# Altium PCB 30A四路继电器控制板.PcbDoc
Units mm, origin at the board's own origin, x right, y up, seen from the top; angles counter-clockwise.
Board outline 254.38 x 101.09 mm, 2 copper layers (Top Layer, Bottom Layer); 44 components, 40 nets, 112 pads, 9 vias.
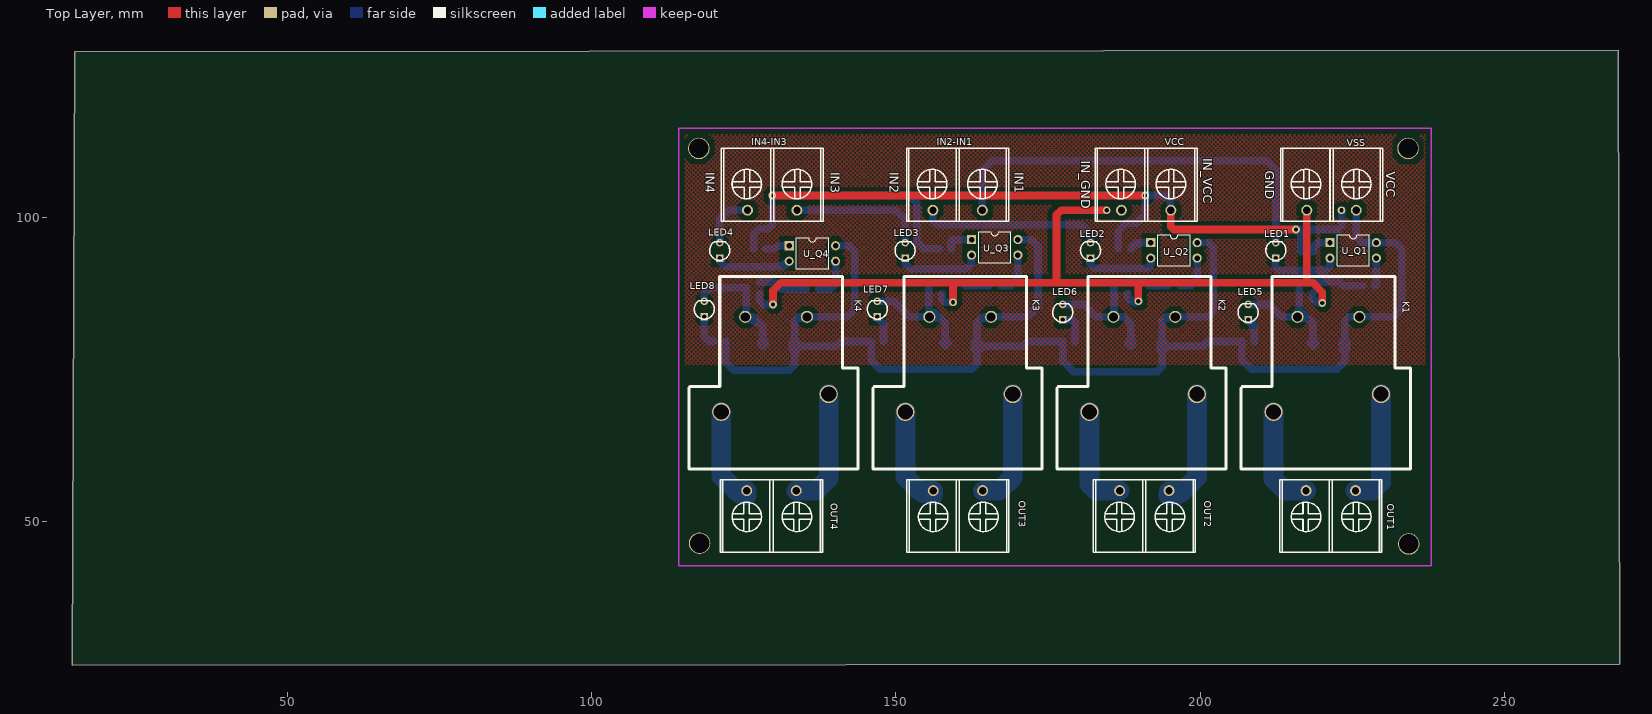
[diagram p0: Top Layer view]
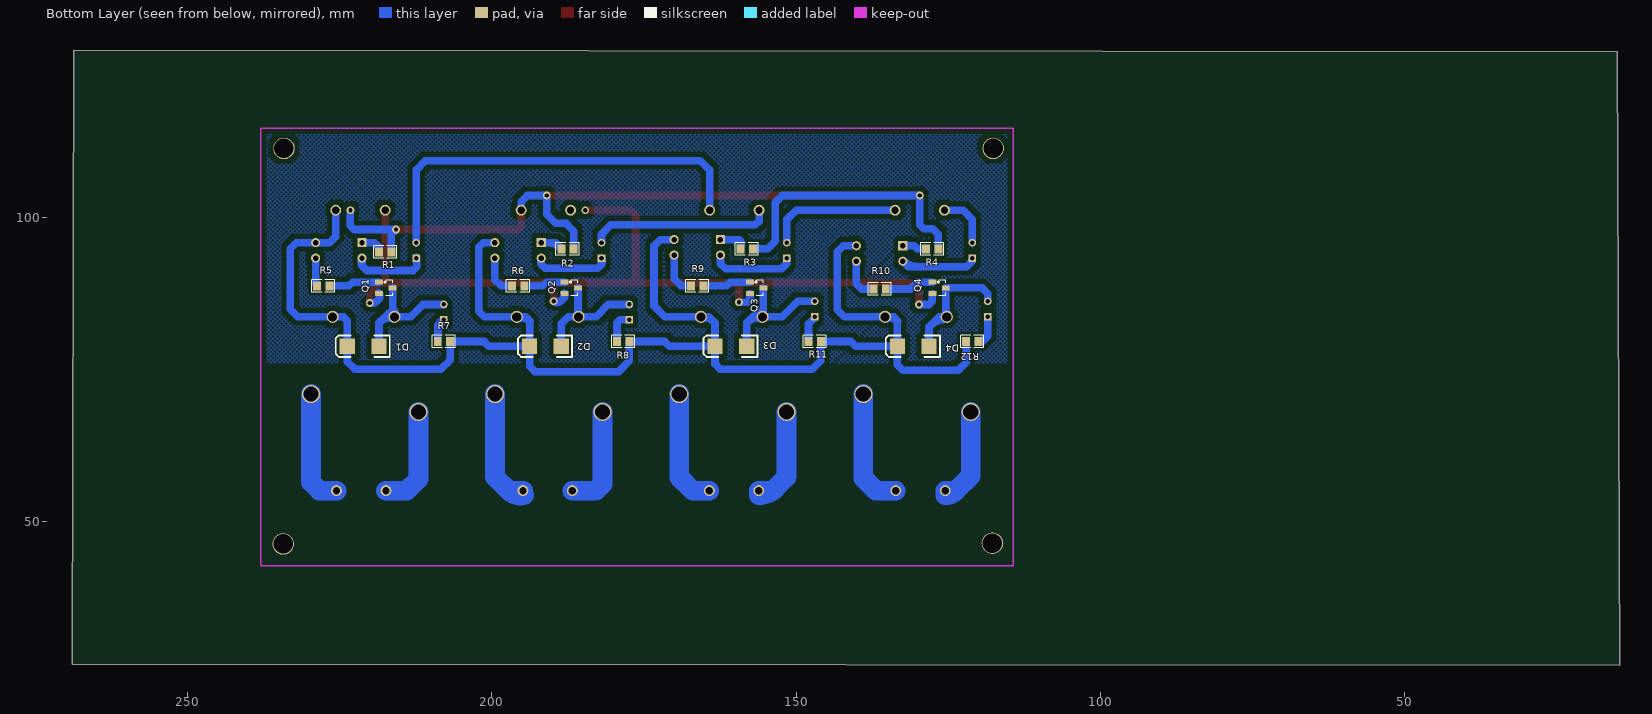
[diagram p1: Bottom Layer view, seen from below]

## Layer stack, top to bottom
Top Layer: signal copper 0.0356
Dielectric: dielectric 0.32, FR-4, Dk 4.8
Bottom Layer: signal copper 0.0356

## Board outline
14.605,26.416 268.986,26.543 268.732,127.508 14.986,127.254

## Design rules (kind name [scope] priority, off if disabled: settings)
Clearance [All] p1: gap=0.754
ComponentClearance [All] p1: gap=0.254 collisioncheckmode=3 verticalgap=0.254
PolygonConnect [All] p1: connectstyle=Relief reliefconductorwidth=0.254 reliefentries=4 polygonreliefangle="90 Angle"
RoutingVias [All] p1: holewidth=0.711 width=1.27 viastyle="Through Hole" minholewidth=0.711 minwidth=1.27 maxholewidth=0.711 maxwidth=1.27
SolderMaskExpansion [All] p1: expansion=0.102
TestPointUsage [All] p1: valid=0 allowmultiple=FALSE
Testpoint [All] p1: side=15 testpointundercomponent=TRUE minsize=1.016 maxsize=2.54 preferedsize=1.524 minholesize=0 maxholesize=1.016 preferedholesize=0.813 testpointgrid=0.025 style=1023 order=0-112345678
Width Width_1 [InNetClass('3mm')] p1: maxlimit=3.254 minlimit=3.254 preferedwidth=3.254
Width [All] p2: maxlimit=1.254 minlimit=1.254 preferedwidth=1.254
17 further rules are at their usual default settings.

## Classes and differential pairs
net class 3mm: NetK1_3 NetK1_4 NetK2_3 NetK2_4 NetK3_3 NetK3_4 NetK4_3 NetK4_4

## Components (designator, comment, footprint, x,y, rotation, side; value= is the part's Value field where it differs from the comment)
D1 "ZL2JG" 7227 223.647,78.867 r0 bottom
D2 "ZL2JG" 7227 193.675,78.867 r0 bottom
D3 "ZL2JG" 7227 163.195,78.867 r0 bottom
D4 "ZL2JG" 7227 133.223,78.867 r0 bottom
IN2-IN1 "PZ_2" KF8500-2 156.083,101.219 r90 top (schematic designator IN1-IN2)
IN4-IN3 "PZ_2" KF8500-2 125.603,101.219 r90 top (schematic designator IN3-IN4)
K1 "JDQ1K" SLA-12VDC-SL-A 229.869,72.515 r180 top
K2 "JDQ1K" SLA-12VDC-SL-A 199.603,72.515 r180 top
K3 "JDQ1K" SLA-12VDC-SL-A 169.338,72.515 r180 top
K4 "JDQ1K" SLA-12VDC-SL-A 139.072,72.515 r180 top
LED1 "" LED_D 210.947,95.123 r90 top
LED2 "" LED_D 180.467,95.123 r90 top
LED3 "" LED_D 149.987,95.123 r90 top
LED4 "" LED_D 119.507,95.123 r90 top
LED5 "" LED_D 206.375,84.963 r90 top
LED6 "" LED_D 175.895,84.963 r90 top
LED7 "" LED_D 145.415,85.471 r90 top
LED8 "" LED_D 116.967,85.471 r90 top
OUT1 "PZ_2" KF8500-2 225.559,55.116 r270 top
OUT2 "PZ_2" KF8500-2 194.91,55.116 r270 top
OUT3 "PZ_2" KF8500-2 164.26,55.116 r270 top
OUT4 "PZ_2" KF8500-2 133.611,55.116 r270 top
Q1 "NPN" SO-G3 217.551,87.503 r270 bottom
Q2 "NPN" SO-G3 187.071,87.503 r270 bottom
Q3 "NPN" SO-G3 156.591,87.503 r270 bottom
Q4 "NPN" SO-G3 126.619,87.503 r270 bottom
R1 "Res" TP-0805-R 215.011,93.091 r180 bottom
R2 "Res" TP-0805-R 185.039,93.599 r180 bottom
R3 "Res" TP-0805-R 155.575,93.599 r180 bottom
R4 "Res" TP-0805-R 125.095,93.599 r180 bottom
R5 "Res" TP-0805-R 230.251,90.043 r0 bottom
R6 "Res" TP-0805-R 198.247,90.043 r0 bottom
R7 "Res" TP-0805-R 205.359,78.359 r180 bottom
R8 "Res" TP-0805-R 175.895,78.359 r180 bottom
R9 "Res" TP-0805-R 168.783,90.043 r0 bottom
R10 "Res" TP-0805-R 138.811,89.535 r0 bottom
R11 "Res" TP-0805-R 144.399,78.359 r180 bottom
R12 "Res" TP-0805-R 123.571,80.899 r0 bottom
U_Q1 "GO" DIP-4 225.171,94.615 r270 top
U_Q2 "GO" DIP-4 195.707,94.615 r270 top
U_Q3 "GO" DIP-4 166.243,95.123 r270 top
U_Q4 "GO" DIP-4 136.271,94.107 r270 top
VCC "PZ_2" KF8500-2 187.071,101.219 r90 top
VSS "PZ_2" KF8500-2 217.551,101.219 r90 top

## Footprints (in the part's own frame and the unit in brackets; to place one, negate y for a bottom-side part, rotate by r counter-clockwise, add the part's x,y. Pads: shape width x height; smd on the part's side, far side on the other; paste and mask are expansions set on the pad)
7227 [mm]
  rect 2.5x2.54 smd: 1(0.127,0) 2(-5.08,0)
  silkscreen extent -6.86,-1.78 2.03,1.78
DIP-4 [mm] "直插4管脚"
  rect 1.5x1.5 hole 0.9: 1(-1.27,-3.81)
  round 1.5 hole 0.9: 2(1.27,-3.81) 3(1.27,3.81) 4(-1.27,3.81)
  silkscreen extent -2.55,-2.65 2.55,2.65
KF8500-2 [mm] "2P螺丝端子"
  round 1.8 hole 1.2: 1(0,0) 2(0,-8.128)
  silkscreen extent -1.78,-12.45 10.16,4.32
LED_D [mm] "发光二极管_3mm"
  rect 1.25x1.25 hole 0.75: 1(-1.778,-1.524)
  round 1.25 hole 0.75: 2(0.762,-1.524)
  silkscreen extent -2.16,-3.17 0.89,0.13
SLA-12VDC-SL-A [mm] "继电器"
  round 2 hole 1.5: 1(3.683,-11.176) 2(13.843,-11.176)
  round 3 hole 2.5: 3(17.78,4.445) 4(0.127,1.524)
  silkscreen extent -4.7,-17.78 23.11,13.84
SO-G3 [mm] "贴片三极管"
  rect 0.85x1.3 smd: 1(-1.9,-0.983) 2(0,-0.983) 3(-0.95,1.217)
  silkscreen extent -2.23,-0.13 0.32,1.22
TP-0805-R [mm] "贴片0805"
  rect 1.3x1.5 smd: 1(-3.556,1.27) 2(-1.524,1.27)
  silkscreen extent -4.44,0.25 -0.63,2.29

## Part data
D1 D2 D3 D4: "整流二极管"
IN2-IN1 IN4-IN3 VCC VSS: "排针——2"
K1 K2 K3 K4: library part JDQYCK, "继电器——1常开1常闭"
LED1 LED2 LED3 LED4 LED5 LED6 LED7 LED8: library part LED, "发光二极管"
OUT1 OUT2 OUT3 OUT4: library part PZ_3, "排针——3"
Q1 Q2 Q3 Q4: "NPN Bipolar Transistor"
R1 R3 R4 R5 R6 R7 R8 R9 R10 R11 R12: "电阻"
R2: library part Res2, "Resistor"
U_Q1 U_Q2 U_Q3 U_Q4: "光耦"

## Free pads (board coordinates)
  round 3.524 hole 3.2: 0(117.602,111.379) 1(117.729,46.482) 2(234.188,111.379) 3(234.315,46.355)

## Via types
v1: diameter 1.27, hole 0.711, Top Layer to Bottom Layer, 9 vias

## Nets (pads, with @x,y where several pads share a name; then routed paths per layer and width w, separated by ;. In a path a pad name is that pad's centre, name@x,y a point inside that pad or via, vN(x,y) a via of type N, cw(c..) or ccw(c..) an arc to the next point about the centre after c; other vN are vias at no path point)
GND: Q1.2 Q2.2 Q3.2 Q4.2 VSS.1 | length 150.2
  Top Layer w1.254: v1(129.794,85.725) 129.794,88.011 131.064,89.281 218.567,89.281 220.091,87.757 v1(220.091,85.979) ; v1(159.385,86.106) 159.385,89.281 ; 176.403,89.281 176.403,100.457 177.165,101.219 v1(184.658,101.219) ; v1(189.865,86.233) 189.865,89.281 ; 217.551,89.281 VSS.1
  Bottom Layer w1.254: Q4.2 127.602,86.266 128.143,85.725 v1(129.794,85.725) ; Q3.2 157.574,86.52 157.988,86.106 v1(159.385,86.106) ; Q2.2 188.054,86.901 188.722,86.233 v1(189.865,86.233) ; Q2.2@188.087,87.565 ccw(c188.949,87.287) 188.308,86.647 ; 188.625,86.33 ccw(c189.295,86.999) v1@189.86,86.239 ; Q1.2 218.534,86.647 219.202,85.979 v1(220.091,85.979) ; Q1.2@218.601,87.63 ccw(c219.25,87.108) 218.661,86.52 ; 218.978,86.203 ccw(c219.694,86.918) v1@220.088,85.986
IN1: IN2-IN1.2 LED1.2 | length 68.1
  Bottom Layer w1.254: IN2-IN1.2 164.211,107.823 165.735,109.347 210.947,109.347 212.471,107.823 LED1.2
IN2: IN2-IN1.1 LED2.2 | length 30
  Bottom Layer w1.254: IN2-IN1.1 156.083,99.441 156.718,98.806 180.467,98.806 181.991,97.282 LED2.2
IN3: IN4-IN3.2 LED3.2 | length 22.2
  Bottom Layer w1.254: IN4-IN3.2 149.987,101.219 151.511,99.695 LED3.2
IN4: IN4-IN3.1 LED4.2 | length 9
  Bottom Layer w1.254: LED4.2 121.031,99.695 122.555,101.219 IN4-IN3.1
INGND: VCC.1
NetD1_2: D1.2 K1.2 LED5.2 Q1.3 | length 28.1
  Bottom Layer w1.254: LED5.2 211.328,85.725 213.362,83.691 K1.2 ; K1.2@215.762,83.955 ccw(c214.382,85.335) 216.334,85.335 ; K1.2@216.026,84.572 cw(c216.026,83.012) 217.129,84.115 ; K1.2@216.171,83.347 cw(c216.932,81.543) 218.316,82.928 ; Q1.3 216.334,83.999 K1.2 ; D1.2@218.126,79.328 ccw(c217.063,80.391) 218.567,80.391 ccw(c220.071,80.391) D1.2@219.008,79.328 ; D1.2 218.567,82.677 217.553,83.691 K1.2
NetD2_2: D2.2 K2.2 LED6.2 Q2.3 | length 24.3
  Bottom Layer w1.254: LED6.2 180.848,85.725 182.882,83.691 K2.2 ; K2.2@185.497,83.955 ccw(c184.634,84.817) 185.854,84.817 ; Q2.3 185.854,83.785 K2.2 ; D2.2@188.154,79.328 ccw(c187.091,80.391) 188.595,80.391 ccw(c190.099,80.391) D2.2@189.036,79.328 ; D2.2 188.595,82.55 187.454,83.691 K2.2
NetD3_2: D3.2 K3.2 LED7.2 Q3.3 | length 30.1
  Bottom Layer w1.254: LED7.2 149.733,86.233 152.275,83.691 K3.2 ; Q3.3 155.374,84.883 ; K3.2@155.495,84.572 cw(c155.495,82.821) 156.733,84.059 156.642,84.15 155.981,84.532 155.374,84.883 ; K3.2@155.636,83.346 cw(c156.425,81.409) 157.904,82.888 ; K3.2@155.758,83.955 cw(c156.687,84.883) 155.374,84.883 ; D3.2@157.674,79.328 ccw(c156.611,80.391) 158.115,80.391 ccw(c159.619,80.391) D3.2@158.556,79.328 ; D3.2 158.115,82.677 157.101,83.691 K3.2 ; 155.374,84.883 155.374,83.812 K3.2
NetD4_2: D4.2 K4.2 LED8.2 Q4.3 | length 28.7
  Bottom Layer w1.254: LED8.2 118.491,87.503 119.441,88.453 Q4.3 125.402,83.864 K4.2 126.494,83.691 128.143,82.042 D4.2 ; K4.2@124.965,83.955 ccw(c123.911,85.009) 125.402,85.009 ; K4.2@125.229,83.318 cw(c125.229,79.364) 128.025,82.16 ; K4.2@125.39,83.355 cw(c126.049,81.982) 127.126,83.059 ; D4.2@127.702,79.328 ccw(c126.639,80.391) 128.143,80.391 ccw(c129.647,80.391) D4.2@128.584,79.328
NetK1_3: K1.3 OUT1.2 | length 17.2
  Bottom Layer w3.254: K1.3 212.089,57.024 213.997,55.116 OUT1.2
NetK1_4: K1.4 OUT1.1 | length 19.2
  Bottom Layer w3.254: OUT1.1 228.344,55.116 229.742,56.514 K1.4
NetK2_3: K2.3 OUT2.2 | length 17.3
  Bottom Layer w3.254: K2.3 181.823,56.175 182.882,55.116 OUT2.2
NetK2_4: K2.4 OUT2.1 | length 24.8
  Bottom Layer w3.254: OUT2.1@194.743,54.408 ccw(c195.351,56.994) 197.229,55.116 ; OUT2.1@194.91,54.389 ccw(c194.91,58.233) 197.628,55.515 ; OUT2.1 197.229,55.116 ; K2.4 199.476,57.363 197.229,55.116
NetK3_3: K3.3 OUT3.2 | length 19.3
  Bottom Layer w3.254: K3.3 151.558,57.357 153.799,55.116 OUT3.2 ; 153.39,55.525 ccw(c156.132,58.267) OUT3.2@156.132,54.389
NetK3_4: K3.4 OUT3.1 | length 19.5
  Bottom Layer w3.254: OUT3.1 167.003,55.116 169.211,57.324 K3.4
NetK4_3: K4.3 OUT4.2 | length 17.7
  Bottom Layer w3.254: K4.3 121.292,57.524 123.7,55.116 OUT4.2 ; 123.68,55.136 ccw(c125.483,56.938) OUT4.2@125.483,54.389
NetK4_4: K4.4 OUT4.1 | length 20
  Bottom Layer w3.254: OUT4.1 136.904,55.116 138.945,57.157 K4.4
NetLED1_1: LED1.1 U_Q1.2 | length 14
  Bottom Layer w1.254: LED1.1@212.344,93.472 LED1.1@212.344,93.345 ; LED1.1 LED1.1@212.344,93.345 ; 221.234,91.948 ccw(c220.558,92.624) U_Q1.2@221.269,93.263 ; U_Q1.2 221.361,92.075 220.599,91.313 212.979,91.313 212.344,91.948 LED1.1@212.344,93.345
NetLED2_1: LED2.1 U_Q2.2 | length 14.9
  Bottom Layer w1.254: LED2.1@181.989,93.346 ccw(c182.771,92.855) 182.118,92.202 ; LED2.1 181.991,92.329 182.626,91.694 191.262,91.694 191.897,92.329 U_Q2.2 ; 191.77,92.202 ccw(c191.221,92.751) U_Q2.2@191.805,93.264
NetLED3_1: LED3.1 U_Q3.2 | length 15.4
  Bottom Layer w1.254: LED3.1@151.509,93.345 ccw(c153.07,93.126) 151.955,92.012 ; LED3.1 151.511,92.456 152.4,91.567 161.544,91.567 162.433,92.456 U_Q3.2
NetLED4_1: LED4.1 U_Q4.2 | length 16.3
  Bottom Layer w1.254: LED4.1@121.029,93.345 ccw(c122.251,93.345) 121.387,92.481 ; LED4.1 121.031,92.837 121.92,91.948 131.572,91.948 U_Q4.2 ; 130.018,91.948 ccw(c130.018,95.28) U_Q4.2@132.374,92.924
NetLED5_1: LED5.1 R7.1 | length 8.6
  Bottom Layer w1.254: LED5.1 208.026,83.185 208.915,82.296 R7.1 ; LED5.1@207.9,83.187 cw(c207.507,81.835) 208.915,81.835 ; LED5.1@207.9,83.186 cw(c205.451,80.737) 208.915,80.737
NetLED6_1: LED6.1 R8.1 | length 5.3
  Bottom Layer w1.254: LED6.1 178.943,83.185 179.451,82.677 R8.1
NetLED7_1: LED7.1 R11.1 | length 4.5
  Bottom Layer w1.254: LED7.1 146.939,83.566 147.955,82.55 R11.1
NetLED8_1: LED8.1 R12.1 | length 6.3
  Bottom Layer w1.254: LED8.1 118.491,80.518 119.38,79.629 R12.1 ; 118.859,80.15 ccw(c119.845,81.137) R12.1@120.012,79.752
NetQ1_1: Q1.1 R5.1 | length 8.4
  Bottom Layer w1.254: Q1.1 222.89,89.403 223.52,88.773 R5.1
NetQ2_1: Q2.1 R6.1 | length 6.9
  Bottom Layer w1.254: Q2.1 191.013,89.403 191.643,88.773 R6.1
NetQ3_1: Q3.1 R9.1 | length 7.9
  Bottom Layer w1.254: Q3.1 160.787,89.403 161.417,88.773 R9.1
NetQ4_1: Q4.1 R10.1 | length 8.1
  Bottom Layer w1.254: Q4.1 130.053,89.403 131.191,88.265 R10.1
NetR1_1: R1.1 U_Q1.1 | length 5.2
  Bottom Layer w1.254: R1.1 218.567,95.123 219.329,95.885 U_Q1.1 ; R1.1@218.59,94.461 cw(c220.244,94.461) 219.074,95.63
NetR2_1: R2.1 U_Q2.1 | length 6.3
  Bottom Layer w1.254: R2.1 188.595,94.996 189.484,95.885 U_Q2.1 ; R2.1@188.611,94.953 cw(c190.862,92.702) 190.862,95.885
NetR3_1: R3.1 U_Q3.1 | length 6.2
  Bottom Layer w1.254: R3.1 159.131,96.139 159.385,96.393 ; R3.1@159.152,94.979 cw(c160.255,95.523) 159.385,96.393 ; U_Q3.1 159.385,96.393
NetR4_1: R4.1 U_Q4.1 | length 4
  Bottom Layer w1.254: R4.1 130.048,94.869 130.556,95.377 U_Q4.1
O1: R5.2 U_Q1.3 | length 5.4
  Bottom Layer w1.254: R5.2@228.711,88.889 ccw(c228.058,89.542) 228.981,89.542 ; R5.2 228.981,89.027 U_Q1.3
O2: R6.2 U_Q2.3 | length 6.8
  Bottom Layer w1.254: R6.2 198.501,88.773 199.517,89.789 U_Q2.3
O3: R9.2 U_Q3.3 | length 7.2
  Bottom Layer w1.254: R9.2 168.91,88.773 170.053,89.916 U_Q3.3
O4: R10.2 U_Q4.3 | length 6.8
  Bottom Layer w1.254: R10.2 139.192,88.265 140.081,89.154 U_Q4.3
VCC: R1.2 R2.2 R3.2 R4.2 VCC.2 | length 162.4
  Top Layer w1.254: v1(129.667,103.632) v1(191.008,103.632) ; VCC.2 195.199,98.552 195.707,98.044 v1(215.773,98.044)
  Bottom Layer w1.254: R4.2 126.619,97.282 127.508,98.171 129.032,98.171 129.667,98.806 v1(129.667,103.632) 152.273,103.632 153.416,102.489 153.416,96.139 154.686,94.869 R3.2 ; R2.2 186.563,97.79 187.833,99.06 189.484,99.06 191.008,100.584 v1(191.008,103.632) 194.183,103.632 195.199,102.616 VCC.2 ; R1.2 216.535,97.282 v1(215.773,98.044) 222.631,98.044 223.266,98.679 v1(223.266,101.219)
VSS: D1.1 D2.1 D3.1 D4.1 K1.1 K2.1 K3.1 K4.1 R7.2 R8.2 R11.2 R12.2 U_Q1.4 U_Q2.4 U_Q3.4 U_Q4.4 VSS.2 | length 284
  Bottom Layer w1.254: R12.2 122.047,76.2 123.317,74.93 132.461,74.93 133.35,75.819 D4.1 ; D4.1@132.909,78.406 cw(c131.846,77.343) 133.35,77.343 cw(c134.854,77.343) D4.1@133.791,78.406 ; D4.1@132.909,79.328 ccw(c131.846,80.391) 133.35,80.391 ccw(c134.854,80.391) D4.1@133.791,79.328 ; 133.28,82.988 cw(c134.522,81.746) K4.1@135.237,83.35 ; D4.1@133.791,78.426 cw(c134.854,77.363) 134.854,78.867 cw(c134.854,80.371) D4.1@133.791,79.308 ; U_Q4.4 142.24,95.377 143.256,94.361 143.256,84.836 142.111,83.691 K4.1 133.983,83.691 133.35,83.058 D4.1 ; D3.1@162.881,78.406 cw(c161.818,77.343) 163.322,77.343 cw(c164.826,77.343) D3.1@163.763,78.406 ; D3.1@162.881,79.328 ccw(c161.818,80.391) 163.322,80.391 ccw(c164.826,80.391) D3.1@163.763,79.328 ; 163.677,83.032 cw(c164.816,81.892) K3.1@165.497,83.353 ; D3.1@163.763,78.426 cw(c164.826,77.363) 164.826,78.867 cw(c164.826,80.371) D3.1@163.763,79.308 ; U_Q3.4 172.339,96.393 173.355,95.377 173.355,85.471 171.575,83.691 K3.1 164.336,83.691 163.322,82.677 D3.1 ; D2.1@193.361,78.406 cw(c192.298,77.343) 193.802,77.343 cw(c195.306,77.343) D2.1@194.243,78.406 ; D2.1@193.361,79.328 ccw(c192.298,80.391) 193.802,80.391 ccw(c195.306,80.391) D2.1@194.243,79.328 ; 193.692,82.948 cw(c195.028,81.613) K2.1@195.773,83.348 ; D2.1@194.243,78.426 cw(c195.306,77.363) 195.306,78.867 cw(c195.306,80.371) D2.1@194.243,79.308 ; U_Q2.4 201.422,95.885 202.184,95.123 202.184,84.582 201.293,83.691 K2.1 194.435,83.691 193.802,83.058 D2.1 ; D1.1@223.333,78.406 cw(c222.27,77.343) 223.774,77.343 cw(c225.278,77.343) D1.1@224.215,78.406 ; D1.1@223.333,79.328 ccw(c222.27,80.391) 223.774,80.391 ccw(c225.278,80.391) D1.1@224.215,79.328 ; VSS.2 225.679,96.901 226.695,95.885 U_Q1.4 232.156,95.885 233.172,94.869 233.172,84.963 231.9,83.691 K1.1 224.407,83.691 223.774,83.058 D1.1 223.774,76.327 222.504,75.057 208.407,75.057 206.883,76.581 R7.2 201.295,79.629 200.533,78.867 D2.1 ; D4.1 140.208,78.867 140.97,79.629 R11.2 145.923,76.454 147.32,75.057 162.433,75.057 163.322,75.946 D3.1 ; D3.1 170.815,78.867 171.577,79.629 R8.2 177.419,76.454 179.197,74.676 192.913,74.676 193.802,75.565 D2.1

## Polygon pours and split planes (outlines as drawn)
no net on Top Layer (hatched 45Degree grid 0.508 track 0.203): 114.681,113.956 114.681,75.819 237.617,75.819 237.617,114.3 114.808,114.3 114.808,113.956
no net on Bottom Layer (hatched 45Degree grid 0.508 track 0.203): 114.808,114.083 114.808,75.946 237.744,75.946 237.744,114.427 114.935,114.427 114.935,114.083

## Keep-outs
Keep-Out Layer:
  lines w0.25: 114.3,114.173 114.3,114.681 ; 114.3,114.681 114.3,42.799 237.998,42.799 237.998,114.681 114.3,114.681

## Silkscreen, mask and mechanical layers (free items; w line width, h text height)
Top Overlay:
  text "IN_VCC" at 200.533,109.728 h1.52 r270
  text "IN_GND" at 180.467,109.347 h1.52 r270
  text "GND" at 210.693,107.696 h1.52 r270
  text "VCC" at 230.632,107.569 h1.52 r270
  text "IN4" at 118.745,107.442 h1.52 r270
  text "IN3" at 139.319,107.442 h1.52 r270
  text "IN2" at 148.971,107.442 h1.52 r270
  text "IN1" at 169.545,107.442 h1.52 r270
Bottom Solder:
  lines w0.254: 198.247,42.418 198.374,42.545
  lines w3: 121.292,68.07 121.292,57.524 123.7,55.116 125.483,55.116 ; 133.611,55.116 136.904,55.116 138.945,57.157 138.945,70.991 ; 151.558,68.07 151.558,57.357 153.799,55.116 156.132,55.116 ; 164.26,55.116 167.257,55.116 169.211,57.07 169.211,70.991 ; 181.823,68.07 181.823,56.556 183.263,55.116 186.782,55.116 ; 194.91,55.116 197.356,55.116 199.476,57.236 199.476,70.991 ; 212.089,68.07 212.089,57.024 213.997,55.116 217.431,55.116 ; 225.559,55.116 228.344,55.116 229.742,56.514 229.742,70.991
Mechanical 1:
  lines w0.25: 114.3,42.799 140.208,42.799 237.998,42.799 237.998,114.681 139.954,114.681 114.3,114.681 114.3,42.799
  lines w0.254: 110.363,44.323 110.871,42.799 ; 110.363,113.157 110.871,114.681 ; 110.617,42.799 111.125,42.799 ; 110.617,114.681 111.125,114.681 ; 110.871,70.843 110.871,42.799 ; 110.871,86.637 110.871,114.681 ; 111.379,44.323 110.871,42.799 ; 111.379,113.157 110.871,114.681 ; 114.3,116.459 114.3,116.967 ; 115.824,116.205 114.3,116.713 ; 115.824,117.221 114.3,116.713 ; 167.554,116.713 114.3,116.713 ; 184.617,116.713 237.871,116.713 ; 236.347,116.205 237.871,116.713 ; 236.347,117.221 237.871,116.713 ; 237.871,116.459 237.871,116.967
  text "123.571 (mm)" at 167.808,115.799 h1.52
  text "71.882 (mm)" at 111.785,71.097 h1.52 r90